# Altium PCB LANtoLIN.PcbDoc
Units mm, origin at the board's own origin, x right, y up, seen from the top; angles counter-clockwise.
Board outline 71.12 x 35.56 mm, 2 copper layers (Top Layer, Bottom Layer); 28 components, 32 nets, 105 pads, 27 vias.
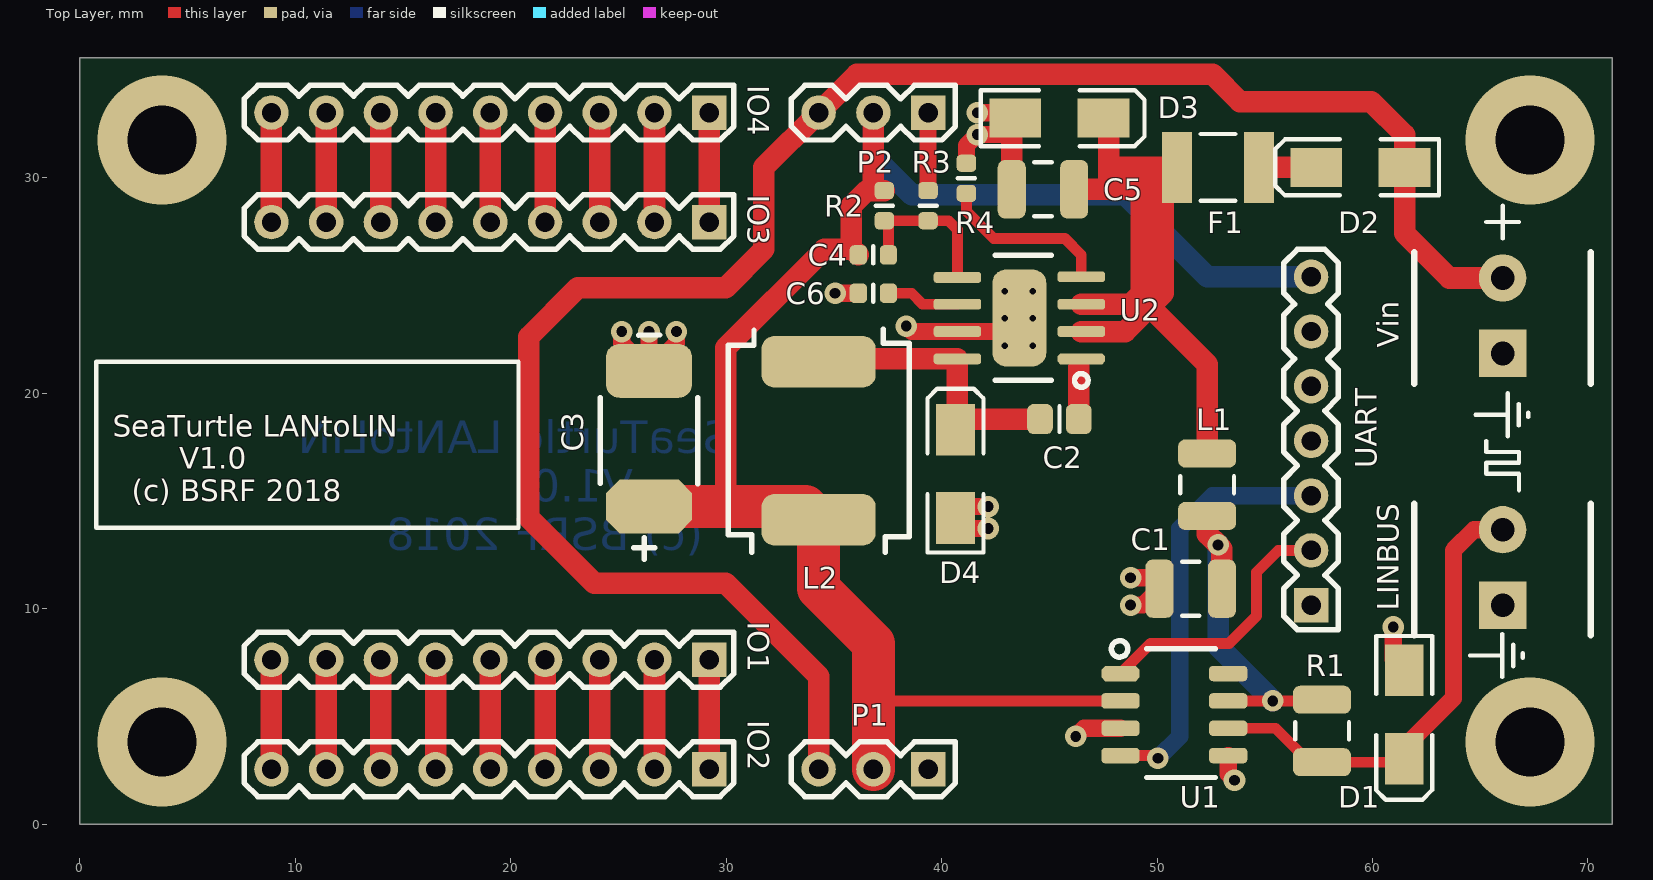
[diagram p0: Top Layer view]
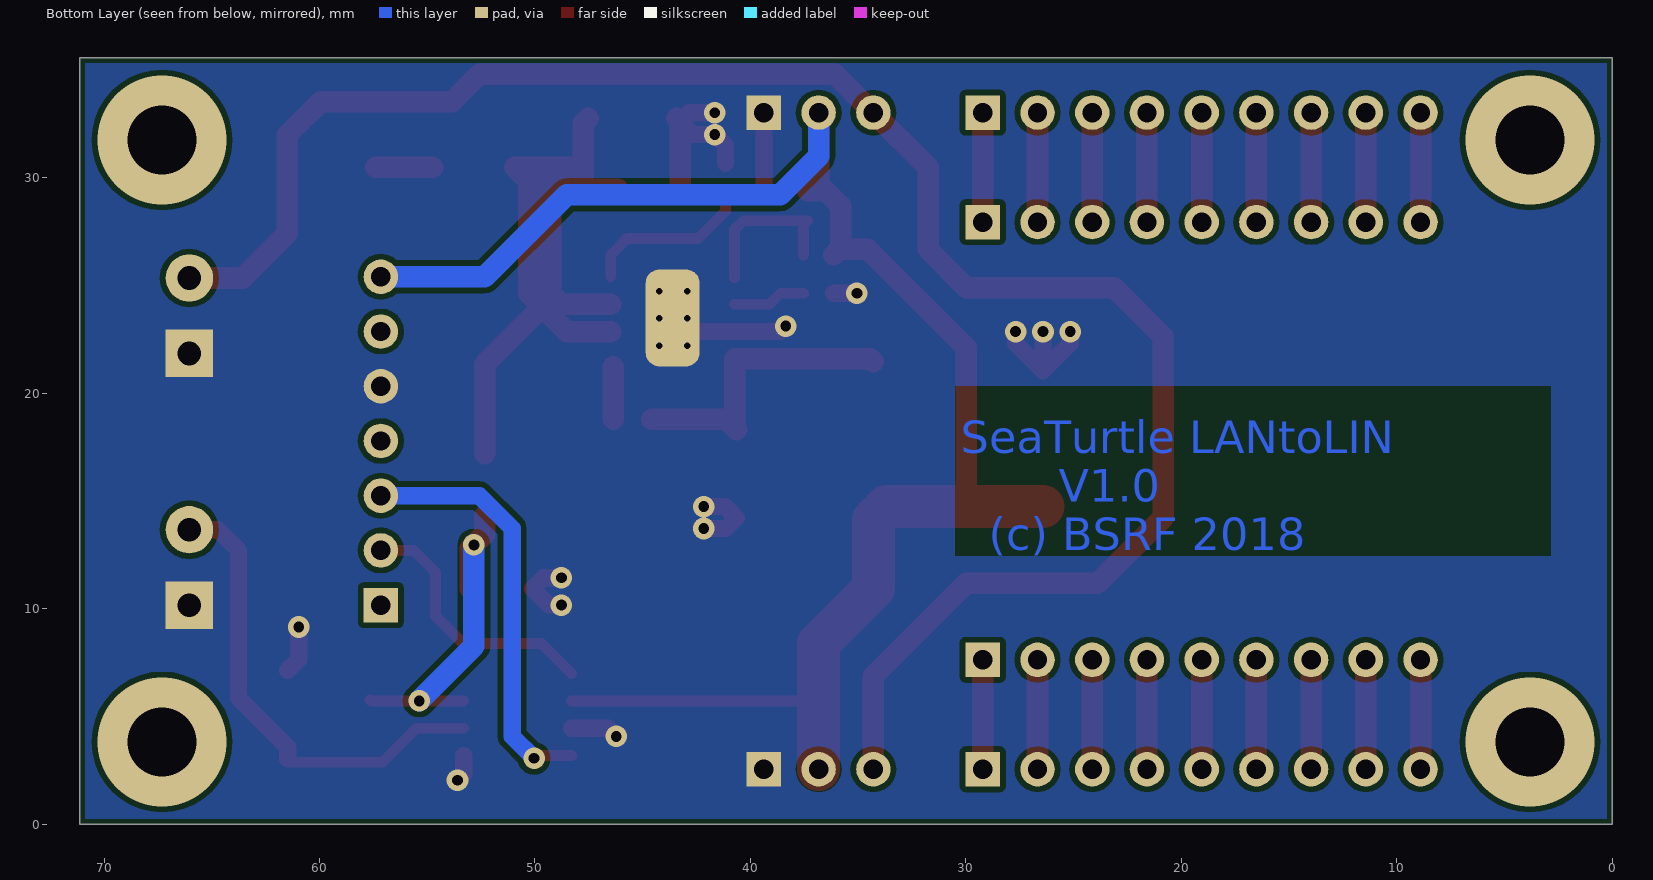
[diagram p1: Bottom Layer view, seen from below]

## Layer stack, top to bottom
Top Solder: solder mask 0.0102, Solder Resist, Dk 3.5
Top Layer: signal copper 0.0356
Dielectric 1: dielectric 0.32, FR-4, Dk 4.8
Bottom Layer: signal copper 0.0356
Bottom Solder: solder mask 0.0102, Solder Resist, Dk 3.5

## Board outline
0,0 71.12,0 71.12,35.56 0,35.56

## Design rules (kind name [scope] priority, off if disabled: settings)
Clearance [All] p1: gap=0.254 ignorepadtopadclearanceinfootprint=FALSE except(0: Arc-Hole Track-Hole SMDPad-Hole THPad-Hole Via-Hole Fill-Hole Poly-Hole Region-Hole Text-Hole)
PolygonConnect PolygonConnect_1 [All vs IsNamedPolygon('Bottom Layer-GND')] p1: connectstyle=Direct reliefconductorwidth=0.254 reliefentries=4 polygonreliefangle="90 Angle" airgapwidth=0.254
PolygonConnect [All] p2: connectstyle=Relief reliefconductorwidth=0.254 reliefentries=4 polygonreliefangle="90 Angle" airgapwidth=0.254
RoutingVias [All] p1: holewidth=0.711 width=1.27 viastyle="Through Hole" minholewidth=0.711 minwidth=1.27 maxholewidth=0.711 maxwidth=1.27
SolderMaskExpansion [All] p1: expansion=0.102
Width [All] p1: maxlimit=5 minlimit=0.254 preferedwidth=0.254
30 further rules are at their usual default settings.

## Components (designator, comment, footprint, x,y, rotation, side; value= is the part's Value field where it differs from the comment)
C1 "10uF" C1210_N 51.562,10.922 r180 top
C2 "100nF" 0805_N_2 45.466,18.796 r180 top
C3 "47uF" TANT_CASE_E 26.416,14.732 r90 top
C4 "270pF" 1608[0603] 36.83,26.416 r0 top
C5 "10uF" C1210_N 44.704,29.464 r180 top
C6 "8.2nF" 1608[0603] 36.83,24.638 r180 top
D1 "SMAJ 15V" SMA 61.468,5.08 r270 top
D2 "B360A" SMA 59.436,30.48 r180 top
D3 "SMAJ 15V" SMA 45.466,32.766 r0 top
D4 "B360A" SMA 40.64,16.256 r90 top
F1 "FUSE" CAPC4532L 52.832,30.48 r0 top
IO1 "HEADER 9P S MALE" CON-SRS-9-0254 29.21,7.62 r180 top
IO2 "HEADER 9P S MALE" CON-SRS-9-0254 29.21,2.54 r180 top
IO3 "HEADER 9P S MALE" CON-SRS-9-0254 29.21,27.94 r180 top
IO4 "HEADER 9P S MALE" CON-SRS-9-0254 29.21,33.02 r180 top
L1 "10uH" C1210_N 52.324,15.748 r90 top
L2 "SRU1038A-6R2Y" "3232DZ (3232)" 34.29,14.224 r90 top
LINBUS "2.54mm HEADER 2 PIN" 284391-2 66.04,10.16 r90 top
P1 "HEADER 3P S MALE" con-srs-3-0254 39.37,2.54 r180 top
P2 "HEADER 3P S MALE" con-srs-3-0254 39.37,33.02 r180 top
R1 "1K" C1210_N 57.658,4.318 r90 top
R2 "68K" 1608[0603] 37.338,28.702 r90 top
R3 "12K" 1608[0603] 39.37,28.702 r270 top
R4 "20.5К" 1608[0603] 41.148,29.972 r270 top value=20.5?
U1 "MCP2003-E/SN" "SO8 (REFLOW)" 50.8,5.08 r270 top
U2 "LMR14020" "S_SO8_POWER_PAD (wave)" 46.482,21.59 r90 top
UART "HEADER 7P S MALE" CON-SRS-7-0254 57.15,10.16 r90 top
Vin "2.54mm HEADER 2 PIN" 284391-2 66.04,21.844 r90 top

## Footprints (in the part's own frame and the unit in brackets; to place one, negate y for a bottom-side part, rotate by r counter-clockwise, add the part's x,y. Pads: shape width x height; smd on the part's side, far side on the other; paste and mask are expansions set on the pad)
0805_N_2 [mm]
  rrect50% 1.2x1.4 smd: 1(-0.9,0) 2(0.9,0)
  silkscreen extent 0,-0.6 0,0.6
1608[0603] [mm] "Chip Capacitor, Body 1.6x0.8mm, IPC High Density"
  rrect50% 0.8x0.9 smd: 1(-0.7,0) 2(0.7,0)
  silkscreen extent 0,-0.4 0,0.4
"3232DZ (3232)" [mm]
  rrect50% 2.4x5.3 smd paste-0.1 mask+0.1: 1(-0.1,0) 2(7.23,0)
  silkscreen extent -1.6,-4.2 8.75,4.2
284391-2 [mm] "3.5mm terminal block 2-pin"
  rect 2.2x2.2 hole 1.1: 1(0,0)
  round 2.2 hole 1.1: 2(3.5,0)
  silkscreen extent -1.4,-4.1 4.7,4.1
C1210_N [mm] "Chip Capacitor, Body 3.2x2.5mm, IPC Medium Density"
  rrect50% 1.3x2.7 smd: 1(-1.45,0) 2(1.45,0)
  silkscreen extent -0.4,-1.25 0.4,1.25
CAPC4532L [mm] "Chip Capacitor, Body 4.5x3.2mm, IPC High Density"
  rect 1.4x3.3 smd: 1(-1.9,0) 2(1.9,0)
  silkscreen extent -0.8,-1.55 0.8,1.55, body extent -2.4,-1.7 2.4,1.7, height 1.4
con-srs-3-0254 [mil]
  rect 63x63 hole 35.43 paste+0 mask+8: 1(0,0)
  round 63 hole 35.43 paste+0 mask+8: 2(100,0) 3(200,0)
  silkscreen extent -50,-50 250,50
CON-SRS-7-0254 [mil]
  rect 63x63 hole 35.43 paste+0 mask+8: 1(0,0)
  round 63 hole 35.43 paste+0 mask+8: 2(100,0) 3(200,0) 4(300,0) 5(400,0) 6(500,0) 7(600,0)
  silkscreen extent -45,-50 650,50
CON-SRS-9-0254 [mil]
  rect 63x63 hole 35.43 paste+0 mask+8: 1(0,0)
  round 63 hole 35.43 paste+0 mask+8: 2(100,0) 3(200,0) 4(300,0) 5(400,0) 6(500,0) 7(600,0) 8(700,0) 9(800,0)
  silkscreen extent -45,-50 850,50
"S_SO8_POWER_PAD (wave)" [mm]
  oct 0.5x2.2 smd: 1(0,0)
  rrect50% 0.5x2.2 smd: 2(1.27,0) 3(2.54,0) 4(3.81,0) 5(3.781,5.75) 6(2.54,5.75) 7(1.27,5.75) 8(0,5.75)
  rrect50% 4.5x2.5 smd paste-2 mask-2: 9(1.9,2.875)
  rrect50% 4.5x2.5 smd far side paste-100: 9(1.9,2.875)
  silkscreen extent -1.32,-0.32 4.8,4
SMA [mm] "DO-214-AC/SMA; 2 C-Bend Leads; Body 5 x 2.7 mm, inc. leads (LxW)"
  rect 2.4x1.8 smd: 1(-2.05,0) 2(2.05,0)
  silkscreen extent -3.65,-1.3 3.95,1.3, body extent -2.92,-1.02 3.05,1.02, height 3
"SO8 (REFLOW)" [mm]
  oct 0.72x1.78 smd: 1(-1.905,-2.5)
  rrect50% 0.72x1.78 smd: 2(-0.635,-2.5) 3(0.635,-2.5) 4(1.905,-2.5) 5(1.905,2.5) 6(0.635,2.5) 7(-0.635,2.5) 8(-1.905,2.5)
  silkscreen extent -3.43,-2.92 2.92,1.91
TANT_CASE_E [mm]
  oct 2.5x4 smd paste-0.05 mask+0.1: 1(0,0)
  rrect50% 2.5x4 smd paste-0.05 mask+0.1: 2(6.3,0)
  silkscreen extent -2.43,-2.27 7.97,2.27

## Part data
C1 C5: library part C100n-10%-0603, "10uF Surface mount CAP 1210 10% 25V", Tolerance=10%, Voltage=25V, (OldCtfName)=(CTF_OLD_NAME_INVALID)
C2: library part C100n-10%-0603, "100nF Surface mount CAP 0603 10% 50V", Tolerance=10%, Voltage=50V, (OldCtfName)=(CTF_OLD_NAME_INVALID)
C3: library part C330uF-63V--Polar, "CAP, TANT, 200UF, 6.3V, CASE E", Tolerance=20%, Voltage=35V, (OldCtfName)=(CTF_OLD_NAME_INVALID)
C4: library part C100n-10%-0603, "270pF Surface mount CAP 0603 10% 35V", Tolerance=10%, Voltage=35V, (OldCtfName)=(CTF_OLD_NAME_INVALID)
C6: library part C100n-10%-0603, "8.2nF Surface mount CAP 0603 10% 35V", Tolerance=10%, Voltage=35V, (OldCtfName)=(CTF_OLD_NAME_INVALID)
D1 D3: library part TVS_SMAJ15, "TVS"
D2 D4: library part TVS_SMAJ15, "B260A"
F1: library part FUSE_1A, "FUSE POLISWITCH"
IO1 IO2 IO3 IO4: "HEADER SINGLE ROW 8P STRAIGHT MALE", (OldCtfName)=(CTF_OLD_NAME_INVALID), Elec_type=ON_BOARD_CONNECTOR
L1: library part XAL4030-332-MEB, Tolerance=20%, (OldCtfName)=(CTF_OLD_NAME_INVALID), Elec_type=SRU1038A-6R2Y
L2: library part XAL4030-332-MEB, "SRU1038A-6R2Y- INDUCTOR 6.8uH", Tolerance=20%, (OldCtfName)=(CTF_OLD_NAME_INVALID), Elec_type=SRU1038A-6R2Y
LINBUS Vin: library part "HEADER 2P S MALE", "HEADER SINGLE ROW 2P STRAIGHT MALE", (OldCtfName)=(CTF_OLD_NAME_INVALID), Elec_type=ON_BOARD_CONNECTOR
P1 P2: "HEADER SINGLE ROW 3P STRAIGHT MALE", (OldCtfName)=(CTF_OLD_NAME_INVALID), Elec_type=ON_BOARD_CONNECTOR
R1 R2: library part R10K-1%-0603, "68K SMD 0603 1%", Tolerance=1%, (OldCtfName)=(CTF_OLD_NAME_INVALID), Wattage=0.065W
R3: library part R10K-1%-0603, "12K SMD 0603 1%", Tolerance=1%, (OldCtfName)=(CTF_OLD_NAME_INVALID), Wattage=0.065W
R4: library part R10K-1%-0603, "20.5? SMD 0603 1%", Tolerance=1%, (OldCtfName)=(CTF_OLD_NAME_INVALID), Wattage=0.065W
U1: "LIN DRIVER MCP2003-E/SN", Manufacturer=MICROCHIP, (OldCtfName)=(CTF_OLD_NAME_INVALID)
U2: "4-40V to 3.3V Buck", Manufacturer=TI, (OldCtfName)=(CTF_OLD_NAME_INVALID)
UART: "HEADER SINGLE ROW 6P STRAIGHT MALE", (OldCtfName)=(CTF_OLD_NAME_INVALID), Elec_type=ON_BOARD_CONNECTOR

## Via types
v1: diameter 1, hole 0.5, Top Layer to Bottom Layer, tented both sides, 17 vias
v2: diameter 0.3, hole 0.3, Top Layer to Bottom Layer, 6 vias
v3: diameter 6, hole 3.2, Top Layer to Bottom Layer, 4 vias

## Nets (pads, with @x,y where several pads share a name; then routed paths per layer and width w, separated by ;. In a path a pad name is that pad's centre, name@x,y a point inside that pad or via, vN(x,y) a via of type N, cw(c..) or ccw(c..) an arc to the next point about the centre after c; other vN are vias at no path point)
GND: C1.2 C3.2 C5.2 C6.2 D1.1 D3.1 D4.1 LINBUS.1 P1.1 P2.1 R3.1 R4.1 U1.3 U1.5 U2.7 U2.9 UART.5 Vin.1 | length 38.1
  Top Layer w0.8: v1(25.146,22.86) 25.146,22.302 C3.2 ; v1(26.416,22.86) C3.2 ; v1(27.686,22.86) 27.686,22.302 C3.2 ; v1(35.052,24.638) C6.2 ; v1(38.354,23.114) 38.608,22.86 U2.7 43.592,22.86 43.607,22.875 U2.9@43.607,23.49 ; R3.1 P2.1 ; R4.1 41.148,31.496 v1(41.656,32.004) 42.654,32.004 43.254,32.604 42.838,33.02 v1(41.656,33.02) ; v1(42.164,13.716) 41.13,13.716 D4.1 41.166,14.732 v1(42.164,14.732) ; v1(46.228,4.064) 46.609,4.445 U1.3 ; v1(48.768,10.16) 49.35,10.16 C1.2 49.604,11.43 v1(48.768,11.43) ; U1.5 53.3,2.326 v1(53.594,2.032) ; v1(60.96,9.144) 60.96,7.638 D1.1
  Top Layer w1: C5.2 43.254,32.604 D3.1
  other v2: 42.932,22.2 44.232,22.2 42.932,23.47 44.232,23.47 42.932,24.74 44.232,24.74
NetC1_1: C1.1 L1.1 R1.2 U1.7 | length 16.3
  Top Layer w0.5: U1.7 v1(55.372,5.715) 57.605,5.715 R1.2
  Top Layer w1: L1.1 52.324,13.462 v1(52.832,12.954) 53.012,12.774 C1.1
  Bottom Layer w1: v1(52.832,12.954) 52.832,8.255 v1(55.372,5.715)
NetC2_1: C2.1 U2.1 | length 2.4
  Top Layer w1: C2.1 46.366,21.22
NetC2_2: C2.2 D4.2 L2.2 U2.8 | length 13.8
  Top Layer w1: L2.2 34.426,21.59 U2.8 D4.2@40.732,18.398 ; D4.2 D4.2@40.732,18.398 ; C2.2 41.13,18.796 D4.2@40.732,18.398
NetC4_2: C4.2 R2.1 R3.2 U2.5 | length 7.5
  Top Layer w0.5: C4.2 37.53,27.81 R2.1 R3.2 40.324,28.002 40.732,27.594 U2.5
NetC6_1: C6.1 U2.6 | length 3.4
  Top Layer w0.5: C6.1 38.608,24.638 39.116,24.13 U2.6
NetD1_2: D1.2 LINBUS.2 R1.1 U1.6 | length 22.2
  Top Layer w0.5: U1.6 55.499,4.445 57.076,2.868 R1.1 61.306,2.868 D1.2
  Top Layer w0.8: D1.2 61.468,3.556 63.754,5.842 63.754,12.7 64.714,13.66 LINBUS.2
NetD2_2: D2.2 F1.2 | length 2.7
  Top Layer w1: F1.2 D2.2
NetIO1_1: IO1.1 IO2.1 | length 5.1
  Top Layer w1: IO2.1 IO1.1
NetIO1_2: IO1.2 IO2.2 | length 5.1
  Top Layer w1: IO2.2 IO1.2
NetIO1_3: IO1.3 IO2.3 | length 5.1
  Top Layer w1: IO2.3 IO1.3
NetIO1_4: IO1.4 IO2.4 | length 5.1
  Top Layer w1: IO2.4 IO1.4
NetIO1_5: IO1.5 IO2.5 | length 5.1
  Top Layer w1: IO2.5 IO1.5
NetIO1_6: IO1.6 IO2.6 | length 5.1
  Top Layer w1: IO2.6 IO1.6
NetIO1_7: IO1.7 IO2.7 | length 5.1
  Top Layer w1: IO2.7 IO1.7
NetIO1_8: IO1.8 IO2.8 | length 5.1
  Top Layer w1: IO2.8 IO1.8
NetIO1_9: IO1.9 IO2.9 | length 5.1
  Top Layer w1: IO2.9 IO1.9
NetIO3_1: IO3.1 IO4.1 | length 5.1
  Top Layer w1: IO3.1 IO4.1
NetIO3_2: IO3.2 IO4.2 | length 5.1
  Top Layer w1: IO3.2 IO4.2
NetIO3_3: IO3.3 IO4.3 | length 5.1
  Top Layer w1: IO3.3 IO4.3
NetIO3_4: IO3.4 IO4.4 | length 5.1
  Top Layer w1: IO3.4 IO4.4
NetIO3_5: IO3.5 IO4.5 | length 5.1
  Top Layer w1: IO3.5 IO4.5
NetIO3_6: IO3.6 IO4.6 | length 5.1
  Top Layer w1: IO3.6 IO4.6
NetIO3_7: IO3.7 IO4.7 | length 5.1
  Top Layer w1: IO3.7 IO4.7
NetIO3_8: IO3.8 IO4.8 | length 5.1
  Top Layer w1: IO3.8 IO4.8
NetIO3_9: IO3.9 IO4.9 | length 5.1
  Top Layer w1: IO3.9 IO4.9
NetR4_2: R4.2 U2.4 | length 8
  Top Layer w0.5: R4.2 41.148,28.448 42.418,27.178 45.72,27.178 46.482,26.416 U2.4
NetU1_1: U1.1 UART.2 | length 12.4
  Top Layer w0.5: U1.1 49.697,8.382 53.34,8.382 54.61,9.652 54.61,11.684 55.626,12.7 UART.2
NetU1_4: U1.4 UART.3 | length 19.6
  Top Layer w0.5: U1.4 49.911,3.175 v1(50.038,3.048)
  Bottom Layer w0.8: v1(50.038,3.048) 51.054,4.064 51.054,13.716 52.578,15.24 UART.3
P5V: C3.1 C4.1 L2.1 P1.2 P2.2 R2.2 U1.2 UART.7 | length 82.3
  Top Layer w0.5: 36.83,5.588 36.957,5.715 U1.2
  Top Layer w0.8: 30.226,15.24 30.734,14.732 30.734,14.224
  Top Layer w1: 30.734,14.732 29.972,15.494 29.972,22.098 34.544,26.67 35.876,26.67 C4.1 35.814,26.732 35.814,28.702 36.514,29.402 R2.2 36.892,29.402 36.83,29.464 P2.2
  Top Layer w2: C3.1 30.734,14.732 33.682,14.732 L2.1 34.29,10.922 36.83,8.382 36.83,5.588 P1.2
  Bottom Layer w1: P2.2 36.83,30.988 38.608,29.21 48.514,29.21 52.324,25.4 UART.7
P12V: C5.1 D3.2 F1.1 L1.2 U2.2 U2.3 | length 44.4
  Top Layer w1: C5.1 47.752,29.464 ; U2.2 48.514,22.86 49.657,24.003 ; U2.3 48.768,24.13 49.276,24.638 49.276,29.21 49.53,29.464 ; D3.2 47.752,32.53 47.752,30.48 ; 49.784,24.892 49.916,25.024 49.916,29.464 ; L1.2 52.324,21.336 49.657,24.003 ; 47.752,29.464 48.514,29.464 ; 47.752,29.464 47.752,30.48 ; 47.752,30.48 49.53,30.48 ; 48.514,29.464 49.53,30.48 ; 48.514,29.464 49.53,29.464 ; 49.53,29.464 49.916,29.85 49.916,29.464 ; 49.53,29.464 49.916,29.464 ; 49.53,30.48 F1.1 F1.1@50.292,29.84 ; 49.657,24.003 50.292,24.638 F1.1@50.292,29.84 ; 49.916,29.464 F1.1@50.292,29.84
Vin: D2.1 P1.3 P2.3 Vin.2 | length 88.3
  Top Layer w1: P1.3 34.29,6.858 29.972,11.176 23.876,11.176 20.828,14.224 20.828,22.606 23.114,24.892 29.972,24.892 31.75,26.67 31.75,30.48 P2.3 36.068,34.798 52.578,34.798 53.848,33.528 59.944,33.528 61.486,31.986 D2.1 61.486,27.414 63.556,25.344 Vin.2
pads on no net: U1.8 UART.1 UART.4 UART.6
copper on no net:
  other v3: 3.81,3.81 67.31,3.81 3.81,31.75 67.31,31.75

## Polygon pours and split planes (outlines as drawn)
GND on Bottom Layer "Bottom Layer-GND" (solid, pour order 0): 0.254,35.306 0.254,0.254 70.866,0.254 70.866,35.306

## Other copper
Bottom Layer:
  text "SeaTurtle LANtoLIN /        V1.0 /   (c) BSRF 2018" at 30.226,12.7 h1.5

## Silkscreen, mask and mechanical layers (free items; w line width, h text height)
Top Overlay:
  lines w0.2: 65.028,7.82 64.528,7.82 66.028,7.82 ; 65.278,17.78 65.278,17.272 66.802,17.272 66.802,16.764 65.278,16.764 65.278,16.256 66.802,16.256 66.802,15.494 ; 65.278,27.94 66.802,27.94 ; 65.282,18.996 64.782,18.996 66.282,18.996 ; 66.028,6.82 66.028,8.82 ; 66.04,27.178 66.04,28.702 ; 66.282,17.996 66.282,19.996 ; 66.528,7.32 66.528,8.32 ; 66.782,18.496 66.782,19.496 ; 66.978,7.72 66.978,7.92 ; 67.232,18.896 67.232,19.096 ; 0.762,13.752 20.36,13.752 20.36,21.452 0.762,21.452 0.762,13.752
  text "SeaTurtle LANtoLIN  /        V1.0 /   (c) BSRF 2018" at 1.524,14.986 h1
Mechanical 4:
  the board outline again, w0.2